# Altium PCB Ocean_s_7_Powerboard.PcbDoc
Units mm, origin at the board's own origin, x right, y up, seen from the top; angles counter-clockwise.
Board outline 111.73 x 86.88 mm, 2 copper layers (Top Layer, Bottom Layer); 106 components, 74 nets, 381 pads, 110 vias.
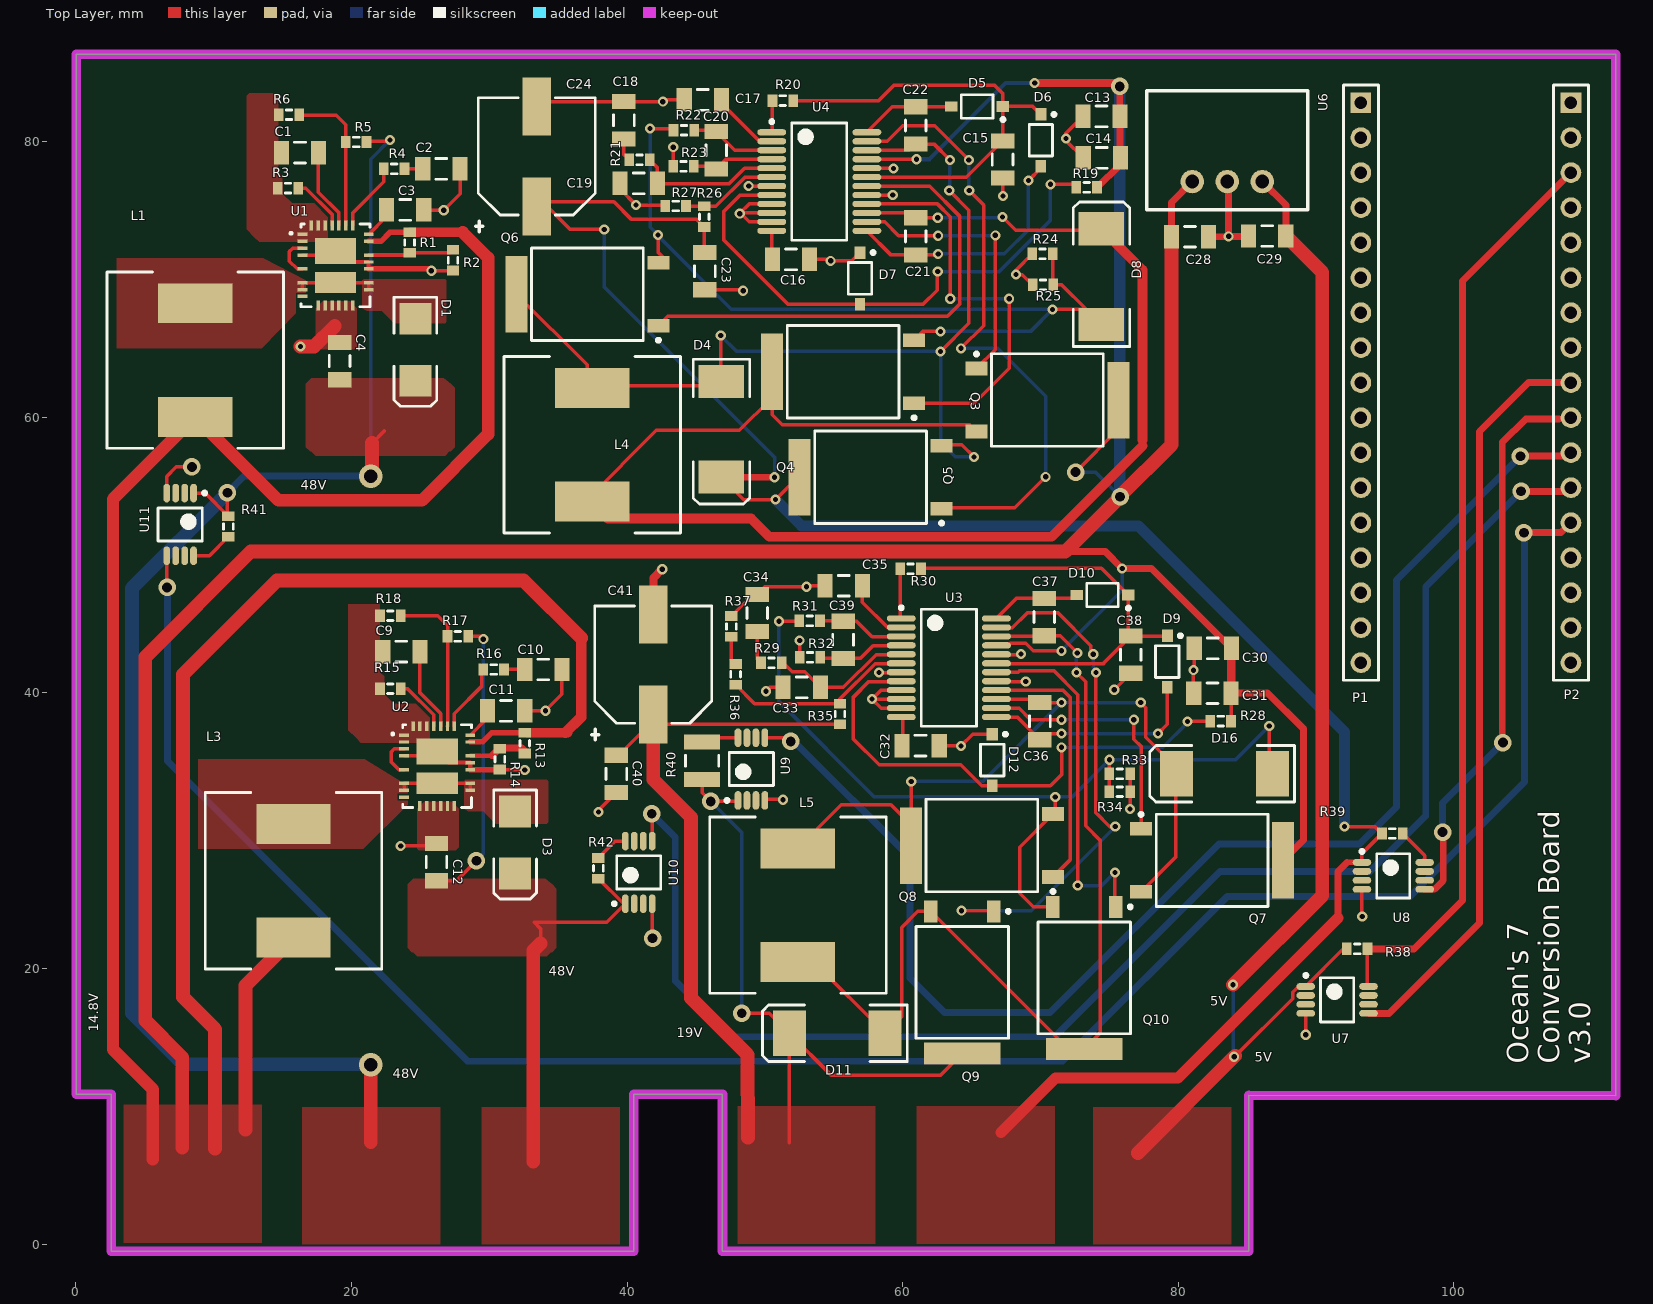
[diagram p0: Top Layer view]
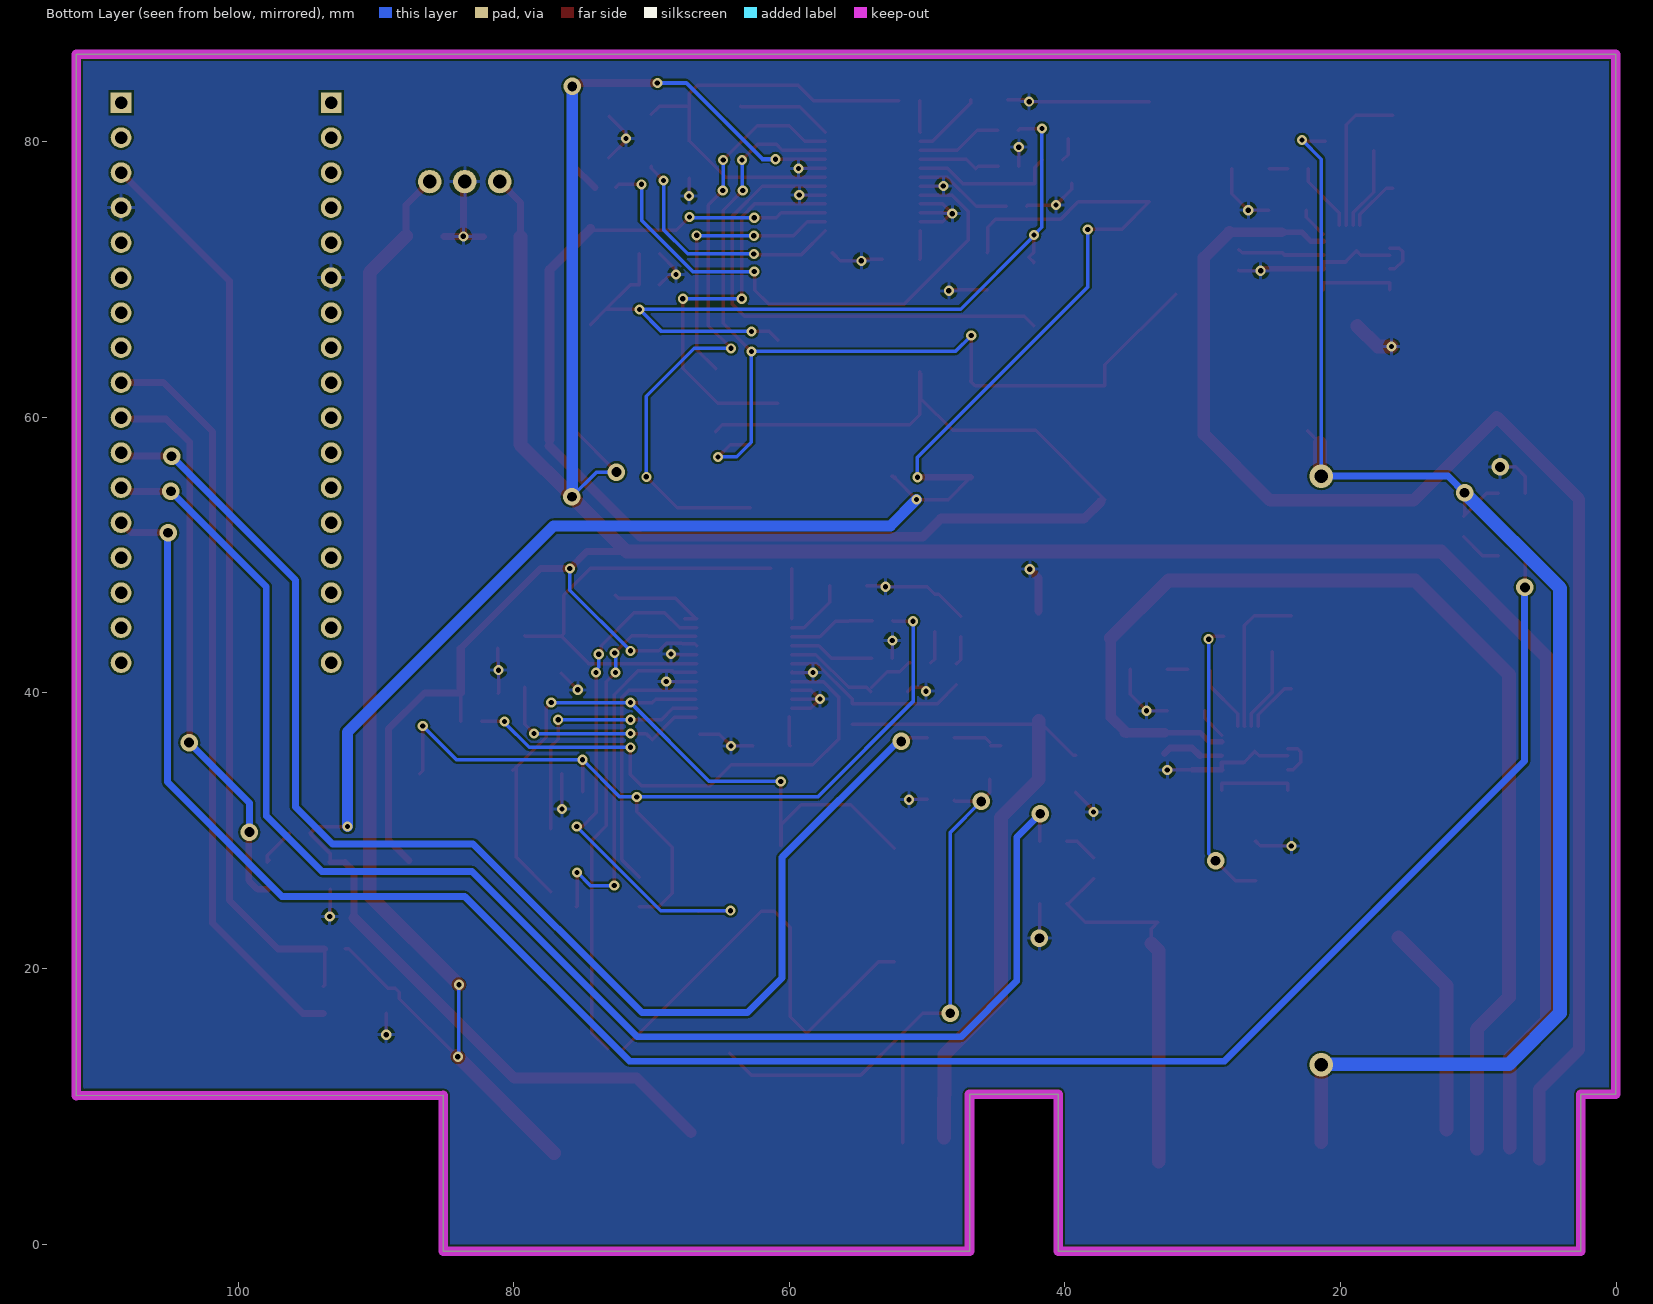
[diagram p1: Bottom Layer view, seen from below]

## Layer stack, top to bottom
Top Solder: solder mask 0.0102, Solder Resist, Dk 3.5
Top Layer: signal copper 0.0356
Dielectric 1: dielectric 0.32, FR-4, Dk 4.8
Bottom Layer: signal copper 0.0356
Bottom Solder: solder mask 0.0102, Solder Resist, Dk 3.5

## Board outline
0.025,10.875 2.575,10.875 2.575,-0.525 40.475,-0.525 40.475,10.875 46.925,10.875 46.925,-0.525 85.1,-0.525 85.1,10.794 111.75,10.769 111.75,86.35 0.025,86.35

## Design rules (kind name [scope] priority, off if disabled: settings)
Clearance [All] p1: gap=0.152
HoleSize [All] p1: absolutevalues=TRUE maxlimit=2.54 minlimit=0.381 maxpercent=80.000 minpercent=20.000
MinimumAnnularRing [All] p1: minimumring=0.178
MinimumSolderMaskSliver [All] p1: minsoldermaskwidth=0.152
PolygonConnect PolygonConnect_1 [All vs IsNamedPolygon('Top Layer-No Net')] p1: connectstyle=Direct reliefconductorwidth=0.254 reliefentries=2 polygonreliefangle="90 Angle" airgapwidth=0.254
PolygonConnect [All] p2: connectstyle=Relief reliefconductorwidth=0.254 reliefentries=4 polygonreliefangle="90 Angle" airgapwidth=0.254
RoutingVias [All] p1: holewidth=0.711 width=1.27 viastyle="Through Hole" minholewidth=0.711 minwidth=1.27 maxholewidth=0.711 maxwidth=1.27
SilkToSilkClearance [All] p1: silktosilkclearance=0
SilkToSolderMaskClearance [IsPad] p1: minsilkscreentomaskgap=0.01 clearancetoexposedcopper=TRUE
SolderMaskExpansion [All] p1: expansion=0.102
Width [All] p1: maxlimit=1.5 minlimit=0.152 preferedwidth=0.254
26 further rules are at their usual default settings.

## Classes and differential pairs
component class 5V_Converter: C28 C29 R38 U3 U6
component class 12V_Converter: C13 C14 C15 C16 C17 C18 C19 C20 C21 C22 C23 C24 D4 D5 D6 D7 D8 L4 Q3 Q4 Q5 Q6 R19 R20 R21 R22 R23 R24 R25 R26 R27 R39 U4 U8
component class 19V_Converter: C30 C31 C32 C33 C34 C35 C36 C37 C38 C39 C40 C41 D9 D10 D11 D12 D16 L5 Q7 Q8 Q9 Q10 R28 R29 R30 R31 R32 R33 R34 R35 R36 R37 R40 U3 U9
component class 48V_0.5A_Converter: C9 C10 C11 C12 D3 L3 R13 R14 R15 R16 R17 R18 R42 U3 U10
component class 48V_Converter: C1 C2 C3 C4 D1 L1 R1 R2 R3 R4 R5 R6 R41 U1 U11
component class Arduino: P1 P2

## Components (designator, comment, footprint, x,y, rotation, side; value= is the part's Value field where it differs from the comment)
C1 "Cap Semi" C1206 16.275,79.2 r0 top
C2 "Cap Semi" C1206 26.525,78.025 r180 top
C3 "Cap Semi" C1206 23.9,75.05 r180 top
C4 "Cap Semi" C1206 19.15,64.075 r270 top
C9 "Cap Semi" C1206 23.625,43 r0 top
C10 "Cap Semi" C1206 33.925,41.7 r180 top
C11 "Cap Semi" C1206 31.225,38.7 r180 top
C12 "Cap Semi" C1206 26.175,27.725 r270 top
C13 "Cap Semi" C1206 74.425,81.825 r0 top
C14 "Cap Semi" C1206 74.45,78.825 r0 top
C15 "Cap Semi" C1206 67.25,78.7 r90 top
C16 "Cap Semi" C1206 51.9,71.45 r180 top
C17 "Cap Semi" C1206 45.5,83.025 r0 top
C18 "Cap Semi" C1206 39.775,81.55 r270 top
C19 "Cap Semi" C1206 40.85,76.975 r0 top
C20 "Cap Semi" C1206 46.475,79.375 r90 top
C21 "Cap Semi" C1206 60.95,73.125 r270 top
C22 "Cap Semi" C1206 60.95,81.175 r90 top
C23 "Cap Semi" C1206 45.65,70.6 r90 top
C24 "390u" Alum_Cap 33.45,78.925 r90 top
C28 "10uF" C1206 80.85,73.1 r180 top
C29 "10uF" C1206 86.45,73.15 r0 top
C30 "Cap Semi" C1206 82.5,43.225 r0 top
C31 "Cap Semi" C1206 82.475,39.975 r0 top
C32 "Cap Semi" C1206 61.3,36.175 r180 top
C33 "Cap Semi" C1206 52.675,40.4 r0 top
C34 "Cap Semi" C1206 49.45,45.8 r270 top
C35 "Cap Semi" C1206 55.725,47.775 r0 top
C36 "Cap Semi" C1206 69.95,37.95 r270 top
C37 "Cap Semi" C1206 70.275,45.5 r90 top
C38 "Cap Semi" C1206 76.55,42.775 r90 top
C39 "Cap Semi" C1206 55.675,43.85 r90 top
C40 "Cap Semi" C1206 39.225,34.125 r90 top
C41 "390u" Alum_Cap 41.9,42.05 r90 top
D1 "MBRS360" SMB 24.65,64.9 r270 top
D3 "MBRS360" SMB 31.875,29.15 r270 top
D4 "MBRS340" SMC 46.85,59.125 r270 top
D5 "1N5819" SOD-123 65.4,82.55 r180 top
D6 "1N5819" SOD-123 70.025,80.1 r270 top
D7 "MMSZ5230B" SOD-123 56.9,70.075 r270 top
D8 "MBRS340" SMC 74.425,70.2 r90 top
D9 "1N5819" SOD-123 79.2,42.275 r270 top
D10 "1N5819" SOD-123 74.5,47.1 r180 top
D11 "MBRS340" SMC 55.25,15.3 r180 top
D12 "MMSZ5230B" SOD-123 66.5,35.125 r270 top
D16 "MBRS340" SMC 83.35,34.125 r180 top
L1 "33uH" INDP125125X45N 8.665,64.147 r90 top
L3 "33uH" INDP125125X45N 15.8,26.375 r90 top
L4 "SRR1240-4R7MCT" INDP125125X45N 37.475,58 r90 top
L5 "SRR1240-4R7MCT" INDP125125X45N 52.4,24.6 r270 top
P1 "Header 17" HDR1X17 93.247,82.83 r270 top
P2 "Header 17" HDR1X17 108.487,82.83 r270 top
Q3 "BUK6212-40C" SOT457P1000X238-3N 70.5,61.25 r0 top
Q4 "BUK6212-40C" SOT457P1000X238-3N 55.675,63.3 r180 top
Q5 "BUK6212-40C" SOT457P1000X238-3N 57.675,55.65 r180 top
Q6 "BUK6212-40C" SOT457P1000X238-3N 37.125,68.925 r180 top
Q7 "BUK6212-40C" SOT457P1000X238-3N 82.45,27.85 r0 top
Q8 "BUK6212-40C" SOT457P1000X238-3N 65.75,28.925 r180 top
Q9 "BUK6212-40C" SOT457P1000X238-3N 64.325,19 r270 top
Q10 "BUK6212-40C" SOT457P1000X238-3N 73.175,19.325 r270 top
R1 "Res3" J1-0603 24.225,72.675 r90 top
R2 "Res3" J1-0603 27.375,71.4 r90 top
R3 "Res3" J1-0603 15.4,76.625 r0 top
R4 "Res3" J1-0603 23.1,78.025 r180 top
R5 "Res3" J1-0603 20.35,79.975 r0 top
R6 "Res3" J1-0603 15.475,81.95 r0 top
R13 "Res3" J1-0603 32.575,36.35 r90 top
R14 "Res3" J1-0603 30.775,35.189 r90 top
R15 "Res3" J1-0603 22.825,40.3 r0 top
R16 "Res3" J1-0603 30.325,41.7 r180 top
R17 "Res3" J1-0603 27.725,44.1 r0 top
R18 "Res3" J1-0603 22.825,45.6 r0 top
R19 "Res3" J1-0603 73.35,76.675 r0 top
R20 "Res3" J1-0603 51.3,82.975 r180 top
R21 "Res3" J1-0603 40.9,78.675 r0 top
R22 "Res3" J1-0603 44.125,80.825 r180 top
R23 "Res3" J1-0603 44.1,78.2 r180 top
R24 "Res3" J1-0603 70.15,71.85 r0 top
R25 "Res3" J1-0603 70.175,69.6 r0 top
R26 "Res3" J1-0603 45.6,74.55 r270 top
R27 "Res3" J1-0603 43.525,75.325 r0 top
R28 "Res3" J1-0603 83.075,37.95 r0 top
R29 "Res3" J1-0603 50.475,42.175 r0 top
R30 "Res3" J1-0603 60.575,49 r180 top
R31 "Res3" J1-0603 53.25,45.225 r180 top
R32 "Res3" J1-0603 53.275,42.575 r180 top
R33 "Res3" J1-0603 75.75,34.125 r180 top
R34 "Res3" J1-0603 75.75,32.825 r180 top
R35 "Res3" J1-0603 55.45,38.475 r270 top
R36 "Res3" J1-0603 47.875,41.35 r270 top
R37 "Res3" J1-0603 47.575,44.825 r270 top
R38 "Res3" J1-0603 92.975,21.425 r0 top
R39 "Res3" J1-0603 95.525,29.8 r0 top
R40 "Res3" 14-1210 45.45,35.075 r90 top
R41 "Res3" J1-0603 11.075,52.075 r270 top
R42 "Res3" J1-0603 37.925,27.275 r90 top
U1 "LT3958EUHE#PBF" LT-UHE-36-V-UHE28MA_V 18.847,71.014 r0 top
U2 "LT3958EUHE#PBF" LT-UHE-36-V-UHE28MA_V 26.222,34.689 r0 top (schematic designator U3)
U3 "LTC3780EG#PBF" LT-G-24_N 63.35,41.825 r0 top (schematic designator U7)
U4 "LTC3780EG#PBF" LT-G-24_N 53.95,77.1 r0 top
U6 "R-78E-0.5" PCBComponent_1 81.01,77.1 r0 top
U7 "AD8217" TSOP65P490X110-8N 91.525,17.725 r0 top
U8 "AD8217" TSOP65P490X110-8N 95.6,26.725 r0 top
U9 "AD8217" TSOP65P490X110-8N 49.025,34.475 r90 top
U10 "AD8217" TSOP65P490X110-8N 40.85,26.975 r90 top
U11 "AD8217" TSOP65P490X110-8N 7.575,52.225 r270 top

## Footprints (in the part's own frame and the unit in brackets; to place one, negate y for a bottom-side part, rotate by r counter-clockwise, add the part's x,y. Pads: shape width x height; smd on the part's side, far side on the other; paste and mask are expansions set on the pad)
14-1210 [mm] "Chip Resistor, Body 3.2x2.5mm, IPC High Density"
  rect 1.1x2.6 smd: 1(-1.35,0) 2(1.35,0)
  silkscreen extent -0.4,-1.2 0.4,1.2, body extent -1.68,-1.32 1.68,1.32, height 0.9
Alum_Cap [mm] "Aluminum Capacitor"
  rect 4.2x2.1 smd: 1(-3.625,0) 2(3.625,0)
  silkscreen extent -5.46,-4.25 4.25,4.44, body extent -4.25,-4.25 4.25,4.25, height 10.5
C1206 [mm] "Chip Capacitor, Body 3.2x1.6mm, IPC High Density"
  rect 1.1x1.7 smd: 1(-1.35,0) 2(1.35,0)
  silkscreen extent -0.4,-0.75 0.4,0.75, body extent -1.7,-0.9 1.7,0.9, height 1.3
HDR1X17 [mm] "Connector; Header; 17 Position"
  rect 1.5x1.5 hole 0.9: 1(0,0)
  round 1.5 hole 0.9: 2(2.54,0) 3(5.08,0) 4(7.62,0) 5(10.16,0) 6(12.7,0) 7(15.24,0) 8(17.78,0) 9(20.32,0) 10(22.86,0) 11(25.4,0) 12(27.94,0) 13(30.48,0) 14(33.02,0) 15(35.56,0) 16(38.1,0) 17(40.64,0)
  silkscreen extent -1.27,-1.27 41.91,1.27
INDP125125X45N [mm] "Precision Wire Wound Inductor, 2-Leads, Body 12.50x12.50mm, IPC Medium Density"
  rect 2.9x5.4 smd: 1(-4.125,0) 2(4.125,0)
  silkscreen extent -6.4,-6.4 6.4,6.4, body extent -6.4,-6.4 6.4,6.4, height 4.5
J1-0603 [mm] "Chip Resistor, Body 1.6x0.8mm, IPC High Density"
  rect 0.7x0.9 smd: 1(-0.75,0) 2(0.75,0)
  silkscreen extent -0.2,-0.35 0.2,0.35, body extent -0.85,-0.48 0.85,0.48, height 0.9
LT-G-24_N [mm] "SOP, 24-Leads, Body 8.5x5.6mm, Pitch 0.65mm, IPC Medium Density"
  oval 2.1x0.45 smd: 1(-3.45,3.575) 2(-3.45,2.925) 3(-3.45,2.275) 4(-3.45,1.625) 5(-3.45,0.975) 6(-3.45,0.325) 7(-3.45,-0.325) 8(-3.45,-0.975) 9(-3.45,-1.625) 10(-3.45,-2.275) 11(-3.45,-2.925) 12(-3.45,-3.575) 13(3.45,-3.575) 14(3.45,-2.925) 15(3.45,-2.275) 16(3.45,-1.625) 17(3.45,-0.975) 18(3.45,-0.325) 19(3.45,0.325) 20(3.45,0.975) 21(3.45,1.625) 22(3.45,2.275) 23(3.45,2.925) 24(3.45,3.575)
  silkscreen extent -3.57,-4.25 2,4.47, body extent -2.8,-4.25 2.8,4.25, height 2
LT-UHE-36-V-UHE28MA_V [mm] "QFN, 28-Leads, Body 6x5mm, Pitch 0.5mm"
  rect 0.7x0.25 smd: 1(-2.4,2.25) 2(-2.4,1.75) 3(-2.4,1.25) 4(-2.4,0.75) 6(-2.4,-0.25) 8(-2.4,-1.25) 9(-2.4,-1.75) 10(-2.4,-2.25) 20(2.4,-1.75) 21(2.4,-1.25) 23(2.4,-0.25) 24(2.4,0.25) 25(2.4,0.75) 27(2.4,1.75) 28(2.4,2.25)
  rect 0.25x0.7 smd: 12(-1.25,-2.9) 13(-0.75,-2.9) 14(-0.25,-2.9) 15(0.25,-2.9) 16(0.75,-2.9) 17(1.25,-2.9) 30(1.25,2.9) 31(0.75,2.9) 32(0.25,2.9) 33(-0.25,2.9) 34(-0.75,2.9) 35(-1.25,2.9) 36(-1.75,2.9)
  rect 3x1.88 smd: 37(0,1.06)
  rect 3x1.53 smd: 38(0,-1.245)
  silkscreen extent -3.27,-3 2.5,3, body extent -2.5,-3 2.5,3, height 0.8
PCBComponent_1 [mm]
  round 1.7 hole 1: 1(0,0) 2(2.54,0) 3(5.08,0)
  silkscreen extent -3.3,-2.03 8.38,6.6, body extent -3.3,-2.03 8.38,6.6, height 10.4
SMB [mm] "DO-214-AA/SMB; 2 C-Bend Leads; Body 5.3 x 3.6 mm, inc. leads (LxW)"
  rect 2.3x2.3 smd: 1(-2.25,0) 2(2.25,0)
  silkscreen extent -3.8,-1.55 4.1,1.55
SMC [mm] "DO-214-AB/SMC; 2 C-Bend Leads; Body 7.9 x 5.9 mm, inc. leads (LxW)"
  rect 2.4x3.3 smd: 1(-3.475,0) 2(3.475,0)
  silkscreen extent -5.07,-2.05 5.43,2.05
SOD-123 [mm] "SOT223, 2-Leads, Body 1.55x3.70mm (avg), Pitch 0.00mm, IPC Medium Density"
  rect 0.9x0.8 smd: 1(-1.875,0)
  rect 0.9x0.75 smd: 2(1.875,0)
  silkscreen extent -2,-0.85 1.15,1.07, body extent -1.43,-0.85 1.43,0.85, height 1.45
SOT457P1000X238-3N [mm] "SOT223, 3-Leads, Body 6.60x10.00mm (avg), Pitch 4.57mm, IPC Medium Density"
  rect 1.6x1 smd: 1(-5.15,2.285) 2(-5.15,-2.285)
  rect 1.6x5.55 smd: 3(5.15,0)
  silkscreen extent -5.27,-3.35 4.05,3.46, body extent -3.11,-3.36 3.11,3.36, height 2.38
TSOP65P490X110-8N [mm] "TSOP, 8-Leads, Body 3.00x3.00mm, Pitch 0.65mm, IPC Medium Density"
  oval 1.35x0.49 smd: 1(-2.275,0.975) 2(-2.275,0.325) 3(-2.275,-0.325) 4(-2.275,-0.975) 5(2.275,-0.975) 6(2.275,-0.325) 7(2.275,0.325) 8(2.275,0.975)
  silkscreen extent -2.4,-1.6 1.2,1.9, body extent -1.6,-1.6 1.6,1.6, height 1.1

## Part data
C1 C2 C3 C4 C9 C10 C11 C12 C13 C14 C15 C16 C17 C18 C19 C20 C21 C22 C23 C30 C31 C32 C33 C34 C35 C36 C37 C38 C39 C40: "Capacitor (Semiconductor SIM Model)"
C24 C41: library part Alum_Cap
C28 C29: library part "Cap Semi", "Capacitor (Semiconductor SIM Model)"
D1 D3: library part "D Schottky", "Schottky Diode"
D4 D8 D11 D16: library part Diode, "Default Diode"
D5 D6 D7 D9 D10 D12 Q3 Q4 Q5 Q6 Q7 Q8 Q9 Q10 U6: library part Component_1
L1 L3: library part IHLP-6767DZ-11, "33uH Inductors"
P1 P2: "Header, 17-Pin"
R1 R2 R3 R4 R5 R6 R13 R14 R15 R16 R17 R18 R19 R20 R21 R22 R23 R24 R25 R26 R27 R28 R29 R30 R31 R32 R33 R34 R35 R36 R37 R38 R39 R40 R41 R42: "Resistor"
U1 U2: "High Input Voltage, Boost, Flyback, SEPIC and Inverting Converter, 36-pin QFN (UHE-36-UHE28MA), -40 to 125 degC, Pb-Free"
U3 U4: "Buck-boost Controller, Constant Frequency, Current Mode Control with Power Good Output, 24-pin SOP (G-24), -40 to 85 degC, Pb-Free"
U7 U8 U9 U10 U11: library part Component_1, "Current Shunt Moniter"

## Via types
v1: diameter 0.737, hole 0.381, Top Layer to Bottom Layer, 91 vias
v2: diameter 1.27, hole 0.711, Top Layer to Bottom Layer, 17 vias
v3: diameter 1.7, hole 1, Top Layer to Bottom Layer, 2 vias

## Nets (pads, with @x,y where several pads share a name; then routed paths per layer and width w, separated by ;. In a path a pad name is that pad's centre, name@x,y a point inside that pad or via, vN(x,y) a via of type N, cw(c..) or ccw(c..) an arc to the next point about the centre after c; other vN are vias at no path point)
GND: C1.1 C2.1 C3.1 C4.1 C9.1 C10.1 C11.1 C12.1 C13.1 C14.1 C15.1 C16.1 C17.1 C18.1 C19.1 C23.1 C24.2 C28.1 C29.1 C30.1 C31.1 C32.1 C33.1 C34.1 C35.1 C38.1 C40.1 C41.2 D7.1 D12.1 P1.6 P2.4 R2.1 R3.1 R6.1 R14.1 R15.1 R18.1 R23.2 R24.1 R25.1 R27.1 R32.2 R33.1 R34.1 R37.1 U1.1 U1.2 U1.4 U1.12 U1.13 U1.14 U1.15 U1.16 U1.17 U1.23 U1.24 U1.34 U1.35 U1.36 U1.37 U2.1 U2.2 U2.4 U2.12 U2.13 U2.14 U2.15 U2.16 U2.17 U2.23 U2.24 U2.34 U2.35 U2.36 U2.37 U3.7 U3.9 U3.10 U3.11 U3.17 U3.20 U4.7 U4.9 U4.10 U4.11 U4.17 U4.20 U6.2 U7.4 U8.4 U9.4 U10.4 U11.4 | length 140.3
  Top Layer w0.254: U11.4 6.6,55.7 7.3,56.4 v2(8.425,56.4) ; U1.4 18.537,71.764 U1.37 U1.37@19.657,71.264 ; v1(23.575,28.9) 25.825,28.9 C12.1@26.175,29.25 ; U2.4 25.912,35.439 U2.37 U2.37@27.032,34.939 ; C3.1@25.2,75.025 v1(26.7,75.025) 27.9,76.225 C2.1@27.9,78.025 ; v1@25.661,70.764 v1(25.8,70.625) 27.35,70.625 R2.1 ; R14.1 32.536,34.439 v1(32.575,34.4) ; C11.1 v1(34.075,38.7) 35.275,39.9 C10.1 ; C24.2@33.875,82.875 39.75,82.875 C18.1 v1(42.6,82.9) 42.725,83.025 C17.1 ; v1(37.925,31.35) 37.925,31.475 C40.1 ; C19.1 39.5,76.55 v1(40.65,75.4) 42.7,75.4 R27.1 ; U10.4 41.825,22.225 v2(41.85,22.2) ; v1(42.55,48.975) v1@42.75,48.975 ; R23.2 v1(43.35,79.6) ; C23.1 48.35,69.25 v1(48.425,69.175) ; R37.1 49.15,47.15 C34.1 50,47.7 v1(53.025,47.7) 53.1,47.775 C35.1 ; v1(48.825,76.775) U4.7 ; v1@49.975,40.025 v1(50.075,40.125) 50.35,40.4 51.1,40.4 C33.1@51.4,40.1 ; U9.4@50,32.3 51.275,32.3 v1(51.325,32.25) ; U4.11 48.875,74.175 v1@48.225,74.825 ; U4.10 v1@48.225,74.825 ; U4.9 48.875,75.475 v1@48.225,74.825 ; R32.2@52.525,42.525 v1(52.525,43.8) ; C16.1 54.675,71.45 v1(54.775,71.35) 56.3,71.35 D7.1 ; U4.17 v1(59.275,76.125) ; U4.20 59.3,78.075 v1(59.325,78.05) ; v1(58.275,41.475) 59.825,41.475 U3.7@59.775,41.525 ; U3.11@59.825,38.875 58.45,38.875 v1@57.8,39.525 ; U3.10@59.825,39.525 v1@57.8,39.525 ; U3.9@59.825,40.175 58.4,40.175 v1(57.775,39.55) v1@57.8,39.525 ; C32.1 62.675,36.15 v1(64.225,36.15) 65.075,37 D12.1 ; U3.17@66.725,40.825 v1(68.925,40.825) ; U3.20@66.725,42.775 68.587,42.775 68.725,42.775 68.675,42.825 v1(68.587,42.825) ; C15.1 67.25,76.075 v1(67.275,76.05) ; R24.1 68.225,70.675 v1(68.225,70.35) 68.675,70.35 R25.1 ; C13.1 71.85,80.6 v1(71.85,80.225) 71.85,80.075 C14.1 ; v1(75.35,40.225) C38.1 ; v1(76.5,31.575) R34.1 R33.1 ; C31.1 81.1,40 v1(81.1,41.65) 81.15,41.7 C30.1 ; U6.2 U6.2@83.65,77 ; v1@83.625,73.1 v1(83.65,73.125) ; C29.1@85.075,73.125 C29.1 ; v1(89.25,15.2) U7.4 ; U8.4 93.325,23.8 v1(93.35,23.775)
  Top Layer w0.3: U1.37@19.657,71.264 U1.24 U1.23 ; U2.37@27.032,34.939 U2.24 U2.23
  Top Layer w0.4: U1.23 25.661,70.764 v1@25.8,70.764 ; U2.23 R14.1
  Top Layer w0.5: C28.1 v1@83.625,73.1 ; U6.2@83.65,77 v1(83.65,73.125) C29.1@85.075,73.125
  Top Layer w0.6: C41.2@41.925,45.925 41.925,48.35 v1(42.55,48.975)
  Top Layer w1: v1(16.3,65.125) 17.3,65.125 18.8,66.625
  other v1: 48.175,74.775
NetC1_2: C1.2 U1.32 | length 6
  Top Layer w0.254: C1.2@17.6,79.325 17.6,76.325 19.097,74.828 U1.32
NetC2_2: C2.2 R4.1 | length 1.3
  Top Layer w0.254: R4.1 C2.2
NetC3_2: C3.2 U1.28 | length 2.3
  Top Layer w0.254: U1.28 22.5,74.517 C3.2@22.5,75.025
NetC4_2: C4.2 D1.2 R5.2 R41.1 U11.1 | length 112
  Top Layer w0.254: U11.1 9.4,54.5 R41.1@11,52.9 ; v2@10.975,54.5 v2(11,54.525) R41.1@11,52.9 ; R41.1 R41.1@11,52.9 ; R5.2@21.1,80.025 22.7,80.025 v1(22.8,80.125) ; v3(21.4,55.725) v3@21.5,55.825 ; 21.5,58.125 22.4,59.025
  Top Layer w1: 21.4,7.4 v3(21.4,13.025) ; v3@21.5,55.825 21.5,58.125
  Bottom Layer w0.254: v3@21.075,13.05 v3@21.4,12.725 ; v3(21.4,13.025) v3@21.4,12.725 ; v3(21.4,55.725) 21.4,78.725 v1(22.8,80.125) ; v3@21.575,12.55 v3@21.4,12.725
  Bottom Layer w0.508: v2(11,54.525) 12.2,55.725 v3(21.4,55.725)
  Bottom Layer w1: v2(11,54.525) 4.075,47.6 4.075,16.775 7.8,13.05 v3@21.075,13.05
NetC9_2: C9.2 U2.32 | length 6
  Top Layer w0.254: C9.2 24.975,40 26.472,38.503 U2.32
NetC10_2: C10.2 R16.1 | length 1.5
  Top Layer w0.254: R16.1 C10.2
NetC11_2: C11.2 U2.28 | length 2.3
  Top Layer w0.254: U2.28 29.875,38.192 C11.2
NetC12_2: C12.2 D3.2 R17.2 R42.1 U10.1 | length 48.6
  Top Layer w0.254: C12.2 27.625,26.375 v2(29.075,27.825) ; R17.2 29.375,44.1 v1(29.575,43.9) ; 33.725,21.825 33.725,22.9 33.275,23.35 38.525,23.35 U10.1 39.75,24.7 R42.1
  Top Layer w1: 33.2,5.975 33.2,21.3 33.725,21.825
  Bottom Layer w0.254: v2(29.075,27.825) 29.575,28.325 v1(29.575,43.9)
NetC13_2: C13.2 C14.2 C28.2 C30.2 C31.2 L1.1 L3.1 Q3.3 Q7.3 R1.2 R13.2 R19.2 R28.2 U1.27 U2.27 U3.21 U4.21 U6.1 | length 460.6
  Top Layer w0.254: U4.21 v1(61,78.725) ; U3.21@66.725,43.425 66.871,43.571 67.759,43.571 67.788,43.6 68.93,43.6 69.48,43.05 v1(71.525,43.05) ; 71.775,50.25 71.8,50.25 ; v2(72.55,56.025) 75.65,59.125 Q3.3 ; C13.2@75.75,81.85 C13.2 ; R28.2 C31.2 C31.2@83.85,40
  Top Layer w0.4: U1.27 22.139,72.764 22.8,73.425 R1.2 ; U2.27 29.514,36.439 30.175,37.1 R13.2 R13.2@32.775,37.1
  Top Layer w0.5: R19.2 75.769,78.308 75.775,78.825 C13.2 ; C13.2@75.75,81.85 v2(75.75,84) ; v1(75.925,49.025) 78.05,49.025 C30.2 ; C28.2 79.5,75.59 U6.1
  Top Layer w0.508: 71.8,50.25 74.7,50.25 v1(75.925,49.025) ; C31.2@83.85,40 86.475,40 89.075,37.4 89.075,29.325 Q7.3
  Top Layer w0.6: v1(69.575,84.25) 75.5,84.25 v2(75.75,84) ; C31.2@83.85,40 C30.2
  Top Layer w0.7: R1.2 28.075,73.425 ; R13.2@32.775,37.1 35.525,37.1 35.675,37.1
  Top Layer w0.762: 35.525,37.1 36.675,38.25 36.675,43.975
  Top Layer w0.9: 5.6,6.15 5.6,11.225 2.7,14.125 2.7,54.057 L1.1 14.712,53.975 25.125,53.975 29.925,58.775 29.925,71.575 28.075,73.425
  Top Layer w1: 7.725,7.025 7.725,13.55 5.05,16.225 5.05,42.6 12.7,50.25 71.775,50.25 ; 10.1,6.925 10.1,15.6 7.775,17.925 7.775,41.325 14.6,48.15 32.5,48.15 36.675,43.975 ; 12.325,8.3 12.325,18.775 L3.1 ; 71.8,50.25 v2(75.775,54.225) ; v2@75.775,54.275 79.5,58 C28.2
  Bottom Layer w0.254: v1(71.525,43.05) 75.925,47.45 v1(75.925,49.025) ; v2(72.55,56.025) 73.975,56.025 v2(75.775,54.225) 75.775,54.4 v2@75.825,54.45
  Bottom Layer w0.3: v1(61,78.725) 61.95,78.725 67.475,84.25 v1(69.575,84.25)
  Bottom Layer w0.8: v2(75.75,84) 75.75,54.525 v2@75.825,54.45
NetC15_2: C15.2 D5.1 D6.1 R20.1 U4.19 | length 33.3
  Top Layer w0.254: R20.1 58.25,82.975 59.35,84.075 66.675,84.075 67.275,83.475 D5.1 ; U4.19 57.423,77.402 64.602,77.402 C15.2 67.275,80.075 D5.1 ; D6.1 69.45,82.55 D5.1
NetC16_2: C16.2 U4.12 | length 2.1
  Top Layer w0.254: U4.12 50.5,71.5 C16.2
NetC17_2: C17.2 U4.2 | length 5
  Top Layer w0.254: C17.2 46.85,82.787 49.612,80.025 U4.2
NetC18_2: C18.2 R21.1 | length 1.7
  Top Layer w0.254: C18.2 39.775,79.05 R21.1
NetC19_2: C19.2 R21.2 U4.5 | length 10.7
  Top Layer w0.254: R21.2 42.2,78.125 C19.2 ; C19.2@42.2,76.95 47.4,76.95 48.525,78.075 U4.5
NetC20_1: C20.1 R23.1 U4.4 | length 6
  Top Layer w0.254: R23.1 46.3,78.2 C20.1 47.175,78.725 U4.4
NetC20_2: C20.2 R22.1 U4.3 | length 6.2
  Top Layer w0.254: R22.1 46.375,80.825 C20.2 47.825,79.375 U4.3
NetC21_1: C21.1 D8.2 L4.1 Q3.2 Q4.3 U4.15 | length 114.4
  Top Layer w0.254: L4.1@37.1,54.025 42.125,59.05 48.15,59.05 50.453,61.353 Q4.3@50.453,63.167 ; Q4.3 50.525,60.175 51.25,59.45 64.865,59.45 Q3.2 ; U4.15 60.6,74.825 C21.1 v1(62.55,74.475) ; v1(67.25,74.525) 68.2,73.575 D8.2@74.425,73.575
  Top Layer w0.7: L4.1@37.4,53.85 38.6,52.65 49,52.65 50.325,51.325 ; 50.475,51.325 70.8,51.325 77.4,57.925 ; D8.2 77.4,70.7 77.4,58.35
  Bottom Layer w0.254: v1(62.55,74.475) 67.2,74.475 v1(67.25,74.525)
NetC21_2: C21.2 D6.2 U4.13 | length 18.2
  Top Layer w0.254: U4.13 59.15,71.775 C21.2 62.5,71.775 v1(62.575,71.85) ; v1(69.125,77.175) 70.025,78.075 D6.2
  Bottom Layer w0.254: v1(62.575,71.85) 67.375,71.85 69.125,73.6 v1(69.125,77.175)
NetC22_1: C22.1 D4.1 L4.2 Q5.2 Q6.3 U4.22 | length 72.6
  Top Layer w0.254: Q6.3 37.1,63.8 37.1,62.275 46.525,62.275 D4.1 46.8,62.65 v1(46.8,65.925) ; U4.22 60.5,79.375 C22.1 62.275,79.825 v1(63.425,78.675) ; v1(62.75,64.775) 64.8,66.825 64.8,75.025 v1(63.375,76.45) ; Q5.2@62.85,58.01 64.29,58.01 v1(65.175,57.125)
  Bottom Layer w0.254: v1(46.8,65.925) 47.95,64.775 v1(62.75,64.775) 62.75,58.2 63.825,57.125 v1(65.175,57.125) ; v1(63.375,76.45) 63.425,76.5 v1(63.425,78.675)
NetC22_2: C22.2 D5.2 U4.24 | length 6.9
  Top Layer w0.254: U4.24 59.25,82.525 C22.2 63.5,82.525 D5.2
NetC23_2: C23.2 C24.1 D4.2 Q5.3 R26.2 R39.1 U8.1 | length 151.1
  Top Layer w0.254: v1(38.35,73.625) 35.875,73.625 33.875,75.625 39.05,75.625 40.325,74.35 45.05,74.35 R26.2 45.6,72 C23.2 ; D4.2 48.475,54.025 v1(50.775,54.025) Q5.3@52.363,55.612 ; Q5.3@52.325,55.65 Q5.3@52.363,55.612 ; Q5.3@52.4,55.575 52.375,55.6 Q5.3@52.363,55.612 ; Q5.3@52.55,55.725 52.475,55.725 Q5.3@52.363,55.612 ; 67.15,8.1 67.35,7.9 ; v1(92.05,30.3) 94.275,30.3 R39.1 93.325,28.35 U8.1
  Top Layer w0.4: 92.25,27.7 U8.1
  Top Layer w0.5: D4.2 v1(50.7,55.65) ; 91.6,23.675 91.6,27.05 92.25,27.7
  Top Layer w0.8: 67.15,8.1 71.1,12.05 79.975,12.05 91.6,23.675
  Bottom Layer w0.254: v1(38.35,73.625) 38.35,69.45 50.7,57.1 v1(50.7,55.65)
  Bottom Layer w0.8: v1(50.775,54.025) 52.675,52.125 77.1,52.125 92.05,37.175 v1(92.05,30.3)
NetC29_2: C29.2 R38.1 U6.3 U7.1 | length 89.7
  Top Layer w0.254: v1(84.05,13.6) 84.075,13.6 88.296,17.821 88.296,18.269 88.606,18.579 89.129,18.579 U7.1 91.975,21.425 R38.1
  Top Layer w0.5: U6.3 87.8,75.39 C29.2
  Top Layer w1: 77.075,6.625 v1(84.05,13.6) v1@84.125,13.675 ; v1(83.975,18.825) 90.45,25.3 90.45,70.5 C29.2
  Bottom Layer w0.254: v1@84,18.825 84,13.65 v1(84.05,13.6)
NetC32_2: C32.2 U3.12 | length 2.1
  Top Layer w0.254: C32.2 60,36.225 U3.12@60,38.275
NetC33_2: C33.2 R29.2 U3.5 | length 10.4
  Top Layer w0.254: R29.2 51.345,42.175 51.995,41.525 52.9,41.525 C33.2 ; C33.2@54.1,40.1 54.4,40.4 55.7,40.4 58.075,42.775 U3.5@59.825,42.775
NetC34_2: C34.2 R29.1 | length 2.4
  Top Layer w0.254: C34.2 49.45,42.45 R29.1
NetC35_2: C35.2 U3.2 | length 4.7
  Top Layer w0.254: C35.2 57.075,46.587 58.937,44.725 U3.2@59.825,44.725
NetC36_1: C36.1 D16.2 L5.1 Q7.2 Q8.3 U3.15 | length 56.3
  Top Layer w0.254: L5.1 55.55,31.875 59.15,31.875 60.6,30.425 Q8.3 60.625,28.95 v1(60.625,33.575) ; U3.15 69.7,39.55 C36.1 v1(71.525,39.3) ; v1(77.275,39.3) 77.65,38.925 77.65,36.775 D16.2@79.825,34.6 ; Q7.2 79.825,28.09 D16.2@79.825,34.6 ; D16.2@79.825,34.625 D16.2@79.825,34.6 ; D16.2@80.05,34.375 D16.2@79.825,34.6
  Bottom Layer w0.254: v1(60.625,33.575) 65.8,33.575 v1(71.525,39.3) v1(77.275,39.3)
NetC36_2: C36.2 D9.2 U3.13 | length 16.2
  Top Layer w0.254: U3.13 68.3,38.25 C36.2 70.4,37.05 v1(71.525,37.05) ; v1(78.525,37.05) 79.2,37.725 D9.2
  Bottom Layer w0.254: v1(71.525,37.05) v1(78.525,37.05)
NetC37_1: C37.1 D11.1 L5.2 Q9.2 Q10.3 U3.22 | length 69.8
  Top Layer w0.254: L5.2 53.55,20.475 D11.1 59.925,16.5 59.925,22.975 61.1,24.15 Q9.2 Q10.3@72.015,14.175 ; U3.22 70.225,44.1 C37.1 71.425,44.15 v1(72.675,42.9) ; v1(72.606,41.479) v1(72.606,41.479) 72.6,41.475 73.275,40.8 73.275,30.35 74.35,29.275 74.35,15.35 Q10.3
  Bottom Layer w0.254: v1(72.606,41.479) 72.606,42.658 72.6,42.664 72.756,42.819 v1(72.675,42.9)
NetC37_2: C37.2 D10.2 U3.24 | length 7.4
  Top Layer w0.254: U3.24@66.725,45.375 U3.24@67.6,45.375 ; U3.24 68.25,46.85 C37.2 72.375,46.85 D10.2
NetC38_2: C38.2 D9.1 D10.1 R30.1 U3.19 | length 32.2
  Top Layer w0.254: R30.1@61.35,49.05 74.425,49.05 D10.1 76.375,44.3 C38.2 ; U3.19@66.725,42.125 72.507,42.125 72.512,42.129 74.604,42.129 74.604,42.179 C38.2 ; D9.1 79.175,44.125 C38.2
NetC39_1: C39.1 R32.1 U3.4 | length 6.2
  Top Layer w0.254: R32.1@54.025,42.525 55.65,42.525 C39.1 56.925,42.5 57.85,43.425 U3.4@59.825,43.425
NetC39_2: C39.2 R31.1 U3.3 | length 6.3
  Top Layer w0.254: R31.1 55.65,45.225 C39.2 56.65,45.2 57.775,44.075 U3.3@59.825,44.075
NetC40_2: C40.2 C41.1 D11.2 Q9.3 R35.2 R40.1 U9.1 | length 96.9
  Top Layer w0.254: C40.2 39.4,35.475 C41.1@41.9,37.975 ; C41.1@41.95,37.725 R35.2 ; R40.1 45.45,32.75 v2(46.075,32.125) 47.975,32.125 U9.1 ; v2(48.325,16.75) 50.325,16.75 D11.2 ; 51.775,7.375 D11.2 ; Q9.3 62.75,12.275 54.8,12.275 D11.2
  Top Layer w1: C41.1@41.9,37.975 41.9,33.725 44.65,30.975 44.65,17.85 48.75,13.75 48.77,7.731
  Bottom Layer w0.254: v2(46.075,32.125) 48.325,29.875 v2(48.325,16.75)
NetD1_1: D1.1 L1.2 U1.8 U1.9 U1.20 U1.21 U1.38 | length 5.8
  Top Layer w0.254: U1.9 U1.8 18.842,69.764 U1.38 21.242,69.769 U1.21 U1.20
NetD3_1: D3.1 L3.2 U2.8 U2.9 U2.20 U2.21 U2.38 | length 5.8
  Top Layer w0.254: U2.9 U2.8 26.217,33.439 U2.38 28.617,33.444 U2.21 U2.20
NetD7_2: D7.2 R19.1 U4.8 | length 39.5
  Top Layer w0.254: U4.8 48.225,76.125 47,74.9 47,72.875 51.675,68.2 D7.2 61.475,68.2 62.5,69.225 v1@62.5,70.575 ; v1(70.725,76.9) 72.375,76.9 R19.1
  Bottom Layer w0.254: v1(62.55,70.575) 67,70.575 70.725,74.3 v1(70.725,76.9)
NetD8_1: D8.1 Q4.2 Q6.2 R22.2 R24.2 R25.2 | length 63.4
  Top Layer w0.254: v1(41.675,80.95) 43.25,80.95 R22.2 ; v1(42.25,73.225) 42.25,71.985 42.625,71.61 42.25,71.235 Q6.2 ; Q4.2 61.465,66.225 v1(62.75,66.225) ; v1(70.875,67.825) D8.1@73.325,67.825 ; R24.2 70.9,69.625 R25.2 71.55,69.6 D8.1@73.325,67.825 ; D8.1 D8.1@73.325,67.825
  Bottom Layer w0.254: v1(41.675,80.95) 41.675,73.8 v1(42.25,73.225) 42.25,73.175 47.575,67.85 70.5,67.85 70.475,67.825 v1(70.875,67.825) 69.275,66.225 v1(62.75,66.225)
NetD12_2: D12.2 R28.1 U3.8 | length 37.4
  Top Layer w0.254: U3.8@59.825,40.825 57.55,40.825 56.431,39.706 56.431,36.644 58.3,34.775 64.225,34.775 65.75,33.25 D12.2 70.725,33.25 71.525,34.05 v1(71.525,36.05) ; v1(80.675,37.925) 80.7,37.95 R28.1
  Bottom Layer w0.254: v1(71.525,36.05) 78.875,36.05 80.675,37.85 v1(80.675,37.925)
NetD16_1: D16.1 Q8.2 Q10.2 R31.2 R33.2 R34.2 | length 64.6
  Top Layer w0.254: v1(51.025,45.2) 52.475,45.2 R31.2 ; Q10.2 69.475,24.475 68.5,25.45 68.5,28.81 Q8.2 71.075,31.385 v1(71.075,32.45) ; R34.2 R33.2 v1(75,35.15) ; v1(86.6,37.6) 86.6,34.35 D16.1
  Bottom Layer w0.254: v1(51.025,45.2) 51.025,39.375 57.95,32.45 v1(71.075,32.45) 72.3,32.45 v1(75,35.15) 84.15,35.15 v1(86.6,37.6)
NetP2_3: P2.3 R38.2 U7.8 | length 67.3
  Top Layer w0.254: R38.2@93.725,21.417 R38.2@93.825,21.421 ; R38.2 93.725,18.775 U7.8
  Top Layer w0.5: R38.2 97.1,21.425 100.625,24.95 100.625,69.888 P2.3
NetP2_9: P2.9 U7.5 | length 54.5
  Top Layer w0.5: U7.5 95.3,16.75 101.85,23.3 101.85,58.95 105.41,62.51 P2.9
NetP2_10: P2.10 U8.5 | length 41
  Top Layer w0.254: U8.5 97.996,25.871 98.519,25.871
  Top Layer w0.5: U8.5 98.571,25.75 99.225,26.404 v2@99.225,30.125 ; v2@103.5,36.4 103.5,58.175 105.21,59.885 107.625,59.885
  Bottom Layer w0.5: v2(99.175,29.9) 99.175,32.025 v2(103.55,36.4)
NetP2_11: P2.11 U9.5 | length 98.6
  Top Layer w0.254: U9.5 51.6,36.75 v2(51.875,36.475) v2@52.125,36.475 ; P2.11@108.232,57.175 P2.11
  Top Layer w0.5: v2(104.825,57.175) P2.11@108.232,57.175
  Bottom Layer w0.5: v2(51.875,36.475) 52.125,36.475 60.525,28.075 60.525,19.3 63.025,16.8 70.7,16.8 82.95,29.05 93.15,29.05 95.825,31.725 95.825,48.175 v2(104.825,57.175)
NetP2_12: P2.12 U10.5 | length 107.7
  Top Layer w0.254: v2(41.8,31.225) 41.825,31.2 U10.5 ; P2.12@108.222,54.625 P2.12
  Top Layer w0.5: v2(104.875,54.625) P2.12@108.222,54.625
  Bottom Layer w0.5: v2(41.8,31.225) 43.5,29.525 43.5,19.1 47.55,15.05 71.025,15.05 83.025,27.05 93.925,27.05 97.95,31.075 97.95,47.7 v2(104.875,54.625)
NetP2_13: P2.13 U11.5 | length 152.6
  Top Layer w0.254: U11.5 6.6,47.675 v2(6.625,47.65)
  Top Layer w0.5: v2(105.075,51.625) 107.762,51.625 P2.13
  Bottom Layer w0.5: v2@6.65,47.65 6.65,35.05 28.425,13.275 71.6,13.275 83.55,25.225 96.825,25.225 105.125,33.525 v2@105.125,51.625
NetQ3_1: Q3.1 U4.14 | length 20
  Top Layer w0.254: U4.14 58.7,74.175 59.7,73.175 v1(62.575,73.175) ; Q3.1 66.725,64.91 v1(66.725,73.2)
  Bottom Layer w0.254: v1(62.575,73.175) 66.7,73.175 v1(66.725,73.2)
NetQ4_1: Q4.1 U4.16 | length 29.8
  Top Layer w0.254: U4.16 62.525,75.475 63.45,74.55 v1(63.45,68.6) v1@63.45,68.5 ; Q4.1 65.19,61.015 67.725,63.55 v1(67.725,68.6)
  Bottom Layer w0.254: v1(63.45,68.6) v1(67.725,68.6)
NetQ5_1: Q5.1 U4.23 | length 45.6
  Top Layer w0.254: U4.23 58.875,80.025 60,81.15 62.325,81.15 v1(64.8,78.675) ; Q5.1@62.85,53.44 68.14,53.44 v1(70.375,55.675) ; v1(64.225,65) 65.875,66.65 65.875,75.4 v1(64.825,76.45)
  Bottom Layer w0.254: v1(64.225,65) 66.9,65 70.375,61.525 v1(70.375,55.675) ; v1(64.8,78.675) 64.8,76.475 v1(64.825,76.45)
NetQ6_1: Q6.1 U4.18 | length 36.5
  Top Layer w0.254: Q6.1 42.96,67.325 63.25,67.325 64.125,68.2 64.125,74.6 61.952,76.773 U4.18@57.402,76.773 ; U4.18@57.4,76.773 U4.18@57.402,76.773 ; U4.18 U4.18@57.402,76.773
NetQ7_1: Q7.1 U3.14 | length 18.5
  Top Layer w0.254: U3.14@66.725,38.875 68.45,38.875 69.275,38.05 v1(71.525,38.05) ; v1(76.775,38.05) 76.775,36.65 77.325,36.1 Q7.1@77.325,30.135
  Bottom Layer w0.254: v1(71.525,38.05) v1(76.775,38.05)
NetQ8_1: Q8.1 U3.16 | length 19.1
  Top Layer w0.254: U3.16 66.823,40.177 71.648,40.177 72.175,39.65 72.175,27.915 Q8.1
NetQ9_1: Q9.1 U3.23 | length 38.2
  Top Layer w0.254: v1(64.275,24.2) 66.56,24.2 Q9.1 ; U3.23@66.725,44.725 67.95,44.725 69.025,45.8 71.275,45.8 73.65,43.425 v1@73.65,43.05 ; v1@74.025,41.444 74.025,31.3 75.025,30.3 v1(75.425,30.3) ; v1@74.031,41.444 v1(74.031,41.479)
  Bottom Layer w0.254: v1(64.275,24.2) 69.325,24.2 v1(75.425,30.3) ; v1(73.825,42.8) 73.825,41.85 74.031,41.644 v1(74.031,41.479)
NetQ10_1: Q10.1 U3.18 | length 26.1
  Top Layer w0.254: U3.18 68.379,41.5 68.504,41.625 70.95,41.625 72.7,39.875 v1(72.7,26.025) ; v1(75.4,26.975) 75.4,24.535 Q10.1
  Bottom Layer w0.254: v1(72.7,26.025) 74.45,26.025 v1(75.4,26.975)
NetR1_1: R1.1 R2.2 U1.25 | length 6.3
  Top Layer w0.254: R1.1 27.15,71.925 R2.2
  Top Layer w0.3: U1.25 24.064,71.764 R1.1
NetR3_2: R3.2 U1.33 | length 4
  Top Layer w0.254: R3.2@16.2,76.625 16.7,76.625 18.597,74.728 U1.33
NetR4_2: R4.2 U1.30 | length 5
  Top Layer w0.254: U1.30 20.097,74.822 22.35,77.075 R4.2
NetR5_1: R5.1 R6.2 U1.31 | length 11
  Top Layer w0.254: R6.2@16.2,81.925 18.9,81.925 19.6,81.225 R5.1 19.597,79.972 U1.31 U1.31@19.6,73.917
NetR13_1: R13.1 R14.2 U2.25 | length 4.6
  Top Layer w0.3: U2.25 30.214,35.439
  Top Layer w0.5: 30.214,35.439 30.775,36 32.375,36 R13.1@32.775,35.6
NetR15_2: R15.2 U2.33 | length 4
  Top Layer w0.254: R15.2 24.075,40.3 25.972,38.403 U2.33
NetR16_2: R16.2 U2.30 | length 5
  Top Layer w0.254: U2.30 27.472,38.497 29.475,40.5 29.475,41.6 R16.2
NetR17_1: R17.1 R18.2 U2.31 | length 11
  Top Layer w0.254: R18.2 26.275,45.6 26.975,44.9 R17.1 26.975,37.592 U2.31
NetR20_2: R20.2 U4.1 | length 2.3
  Top Layer w0.254: U4.1 50.55,80.725 R20.2
NetR26_1: R26.1 R27.2 U4.6 | length 7.1
  Top Layer w0.254: R27.2 45.575,75.325 R26.1 46.434,75.3 48.559,77.425 U4.6
NetR30_2: R30.2 U3.1 | length 3.7
  Top Layer w0.254: U3.1@59.825,45.375 R30.2@59.825,49.025
NetR35_1: R35.1 R36.2 U3.6 | length 13.9
  Top Layer w0.254: R36.2 49.25,39.225 R35.1 55.45,39.575 58,42.125 U3.6@59.825,42.125
NetR36_1: R36.1 R37.2 | length 2.1
  Top Layer w0.254: R37.2 47.575,42.4 R36.1
NetR39_2: R39.2 U8.8 | length 3
  Top Layer w0.254: R39.2 97.875,28.2 U8.8 U8.8@97.725,27.85
NetR40_2: R40.2 U9.8 | length 3.5
  Top Layer w0.254: R40.2@44.652,36.15 R40.2@45.4,36.15 ; R40.2 45.775,36.75 U9.8
NetR41_2: R41.2 U11.8 | length 3.1
  Top Layer w0.254: U11.8 9.7,49.95 R41.2
NetR42_2: R42.2 U10.8 | length 2.5
  Top Layer w0.254: R42.2 39.15,29.25 U10.8
NetU1_3: U1.3 U1.6 | length 2.9
  Top Layer w0.254: U1.6 16.061,70.764 15.5,71.325 15.5,72.025 15.739,72.264 U1.3
NetU3_3: U2.3 U2.6 | length 2.9
  Top Layer w0.254: U2.6 23.436,34.439 22.875,35 22.875,35.7 23.114,35.939 U2.3
pads on no net: P1.1 P1.2 P1.3 P1.4 P1.5 P1.7 P1.8 P1.9 P1.10 P1.11 P1.12 P1.13 P1.14 P1.15 P1.16 P1.17 P2.1 P2.2 P2.5 P2.6 P2.7 P2.8 P2.14 P2.15 P2.16 P2.17 U1.10 U2.10 U7.2 U7.3 U7.6 U7.7 U8.2 U8.3 U8.6 U8.7 U9.2 U9.3 U9.6 U9.7 U10.2 U10.3 U10.6 U10.7 U11.2 U11.3 U11.6 U11.7

## Polygon pours and split planes (outlines as drawn)
NetD3_1 on Top Layer "Top Layer-No Net" (solid, pour order 12): 8.9,35.2 8.9,28.7 20.875,28.7 24.075,31.9 24.075,33.278 20.984,35.2
GND on Top Layer "Top Layer-No Net" (solid, pour order 18): 25.283,32.1 24.775,31.592 24.775,29.7 24.775,28.7 24.875,28.6 27.575,28.6 27.675,28.7 27.775,28.8 27.775,31.6 27.275,32.1
NetC12_2 on Top Layer "Top Layer-No Net" (solid, pour order 24): 24.475,26.5 24.075,26.1 24.075,24.1 24.075,21.5 24.375,21.2 24.475,21.2 24.775,20.9 34.175,20.9 34.475,21.2 34.575,21.2 34.875,21.5 34.875,25.8 34.575,26.1 34.075,26.5
GND on Top Layer "Top Layer-No Net" (solid, pour order 21): 25.675,38.2 24.675,39.2 23.075,39.2 22.375,39.9 22.375,41.2 22.075,41.5 22.075,46.45 19.775,46.45 19.775,37.3 20.375,36.7 20.675,36.4 25.475,36.4 25.575,36.5 25.675,36.6
NetD3_1 on Top Layer "Top Layer-No Net" (solid, pour order 15): 28.275,33.7 28.175,33.6 28.175,31.6 28.475,31.4 29.575,31.4 30.475,30.5 34.175,30.5 34.275,30.6 34.275,33.6 34.175,33.7 34.075,33.7
NetC4_2 on Top Layer "Top Layer-No Net" (solid, pour order 26): 17.1,62.825 16.7,62.425 16.7,60.425 16.7,57.825 17,57.525 17.1,57.525 17.4,57.225 26.8,57.225 27.1,57.525 27.2,57.525 27.5,57.825 27.5,62.125 27.2,62.425 26.7,62.825
GND on Top Layer "Top Layer-No Net" (solid, pour order 23): 18.3,74.525 17.3,75.525 15.7,75.525 15,76.225 15,77.525 14.7,77.825 14.7,83.525 12.6,83.525 12.4,83.325 12.4,73.625 13,73.025 13.3,72.725 18.1,72.725 18.2,72.825 18.3,72.925
GND on Top Layer "Top Layer-No Net" (solid, pour order 20): 17.908,68.425 17.4,67.917 17.4,66.025 17.4,65.025 17.5,64.925 20.2,64.925 20.3,65.025 20.4,65.125 20.4,67.925 19.9,68.425
NetD1_1 on Top Layer "Top Layer-No Net" (solid, pour order 17): 20.9,70.025 20.8,69.925 20.8,67.925 21.1,67.725 22.2,67.725 23.1,66.825 26.8,66.825 26.9,66.925 26.9,69.925 26.8,70.025 26.7,70.025
NetD1_1 on Top Layer "Top Layer-No Net" (solid, pour order 14): 2.975,71.525 2.975,65.025 13.5,65.025 15.975,67.55 15.975,68.975 16.7,69 16.7,69.925 13.609,71.525
NetC13_2 on Top Layer "Top Layer-No Net" (solid, pour order 32): 3.5,10.1 13.5,10.1 13.5,0.1 3.5,0.1
NetC12_2 on Top Layer "Top Layer-No Net" (solid, pour order 40): 29.475,9.95 39.475,9.95 39.475,-0.05 29.475,-0.05
NetC40_2 on Top Layer "Top Layer-No Net" (solid, pour order 44): 48.025,10.025 58.025,10.025 58.025,0.025 48.025,0.025
NetC23_2 on Top Layer "Top Layer-No Net" (solid, pour order 48): 61.025,10.025 71.025,10.025 71.025,0.025 61.025,0.025
NetC29_2 on Top Layer "Top Layer-No Net" (solid, pour order 52): 73.825,9.925 83.825,9.925 83.825,-0.075 73.825,-0.075
NetC4_2 on Top Layer "Top Layer-No Net" (solid, pour order 36): 16.45,9.925 26.45,9.925 26.45,-0.075 16.45,-0.075
GND on Bottom Layer "Top Layer-No Net" (solid, pour order 38): 16.5,9.925 26.5,9.925 26.5,-0.075 16.5,-0.075
GND on Bottom Layer "Top Layer-No Net" (solid, pour order 42): 29.5,9.925 39.5,9.925 39.5,-0.075 29.5,-0.075
GND on Bottom Layer "Top Layer-No Net" (solid, pour order 46): 47.9,9.925 57.9,9.925 57.9,-0.075 47.9,-0.075
GND on Bottom Layer "Top Layer-No Net" (solid, pour order 50): 60.875,9.925 70.875,9.925 70.875,-0.075 60.875,-0.075
GND on Bottom Layer "Top Layer-No Net" (solid, pour order 54): 73.875,9.95 83.875,9.95 83.875,-0.05 73.875,-0.05
GND on Bottom Layer "GND_PLANE" (solid, pour order 58): 0.025,86.4 111.75,86.4 111.75,11.05 0.025,11.05
GND on Bottom Layer "GND_PLANE" (solid, pour order 60): 84.701,11.225 84.701,10.458 84.701,-0.537 47.226,-0.537 47.226,11.225 62.6,11.225
GND on Bottom Layer "GND_PLANE" (solid, pour order 62): 2.825,11.325 2.825,-0.45 40,-0.45 40,11.325
no net on Bottom Solder "Top Layer-No Net" (solid): 3.55,9.95 13.55,9.95 13.55,-0.05 3.55,-0.05
no net on Bottom Solder "Top Layer-No Net" (solid): 16.45,9.95 26.45,9.95 26.45,-0.05 16.45,-0.05
no net on Bottom Solder "Top Layer-No Net" (solid): 29.35,9.95 39.35,9.95 39.35,-0.05 29.35,-0.05
no net on Bottom Solder "Top Layer-No Net" (solid): 47.95,9.95 57.95,9.95 57.95,-0.05 47.95,-0.05
no net on Bottom Solder "Top Layer-No Net" (solid): 60.85,9.95 70.85,9.95 70.85,-0.05 60.85,-0.05
no net on Bottom Solder "Top Layer-No Net" (solid): 73.75,9.95 83.75,9.95 83.75,-0.05 73.75,-0.05
no net on Top Solder "Top Layer-No Net" (solid): 3.55,9.95 13.55,9.95 13.55,-0.05 3.55,-0.05
no net on Top Solder "Top Layer-No Net" (solid): 16.45,9.95 26.45,9.95 26.45,-0.05 16.45,-0.05
no net on Top Solder "Top Layer-No Net" (solid): 29.35,9.95 39.35,9.95 39.35,-0.05 29.35,-0.05
no net on Top Solder "Top Layer-No Net" (solid): 47.95,9.95 57.95,9.95 57.95,-0.05 47.95,-0.05
no net on Top Solder "Top Layer-No Net" (solid): 60.85,9.95 70.85,9.95 70.85,-0.05 60.85,-0.05
no net on Top Solder "Top Layer-No Net" (solid): 73.75,9.95 83.75,9.95 83.75,-0.05 73.75,-0.05

## Keep-outs
Keep-Out Layer:
  the board outline again, w0.7

## Silkscreen, mask and mechanical layers (free items; w line width, h text height)
Top Overlay:
  text "48V" at 16.325,54.725 h0.7
  text "48V" at 34.325,19.475 h0.7
  text "5V" at 82.3,17.3 h0.7
  text "14.8V" at 1.65,15.4 h0.7 r90
  text "19V" at 43.6,15 h0.7
  text "5V" at 85.55,13.225 h0.7
  text "Ocean's 7  / Conversion Board / v3.0" at 109.875,13.1 h1.5 r90
  text "48V" at 23,12.05 h0.7